# EAGLE board USB_Logi (EAGLE 5.11)

No outline drawn. Coordinates in mm, seen from the top.
Copper layers (1*16): Top 0.035mm / dielectric 1.5mm / Bottom 0.035mm
Design rules "default": minimum track width 10mil, minimum drill 24mil, track to track 8mil, track to pad 8mil, pad to pad 8mil, via to via 8mil, smd to smd 8mil, copper to edge 40mil, drill to drill 8mil, minimum pad ring 10mil, minimum via ring 8mil, stop-mask expansion 4mil, vias tented up to drill 0mil, thermal gap 10mil

## Footprints (pad centres in the part's own frame; a part is rotated, then mirrored left to right if it is on the bottom)
DIL28 = drill 0.813 long: 1 -16.51,-3.81; 2 -13.97,-3.81; 3 -11.43,-3.81; 4 -8.89,-3.81; 5 -6.35,-3.81; 6 -3.81,-3.81; 7 -1.27,-3.81; 8 1.27,-3.81; 9 3.81,-3.81; 10 6.35,-3.81; 11 8.89,-3.81; 12 11.43,-3.81; 13 13.97,-3.81; 14 16.51,-3.81; 15 16.51,3.81; 16 13.97,3.81; 17 11.43,3.81; 18 8.89,3.81; 19 6.35,3.81; 20 3.81,3.81; 21 1.27,3.81; 22 -1.27,3.81; 23 -3.81,3.81; 24 -6.35,3.81; 25 -8.89,3.81; 26 -11.43,3.81; 27 -13.97,3.81; 28 -16.51,3.81
AE-GYRO = drill 0.813 long: GND@1 -3.81,-3.81; GND@2 5.08,-3.81; GND@3 5.08,-1.27; GND@4 5.08,1.27; OUT1 -3.81,3.81; OUT2 -3.81,1.27; VCC@1 -3.81,-1.27; VCC@2 5.08,3.81

## Placement (x,y rotation side)
IC1  [DIL28]  7.62,-19.05 0 top
U$1  AE-GYRO  [AE-GYRO]  -20.32,-17.78 0 top

## Library data of the parts
IC1 = pic18f2550
U$1 = bant

## Nets
GND: U$1.GND@1 U$1.GND@2 U$1.GND@3
VCC: U$1.VCC@1

## Tracks (layer width: path | path; a pad name or v marks a point on that pad's centre or on a via)
GND  (2 unrouted)